# EAGLE board transmitter_new (EAGLE 9.6.2)
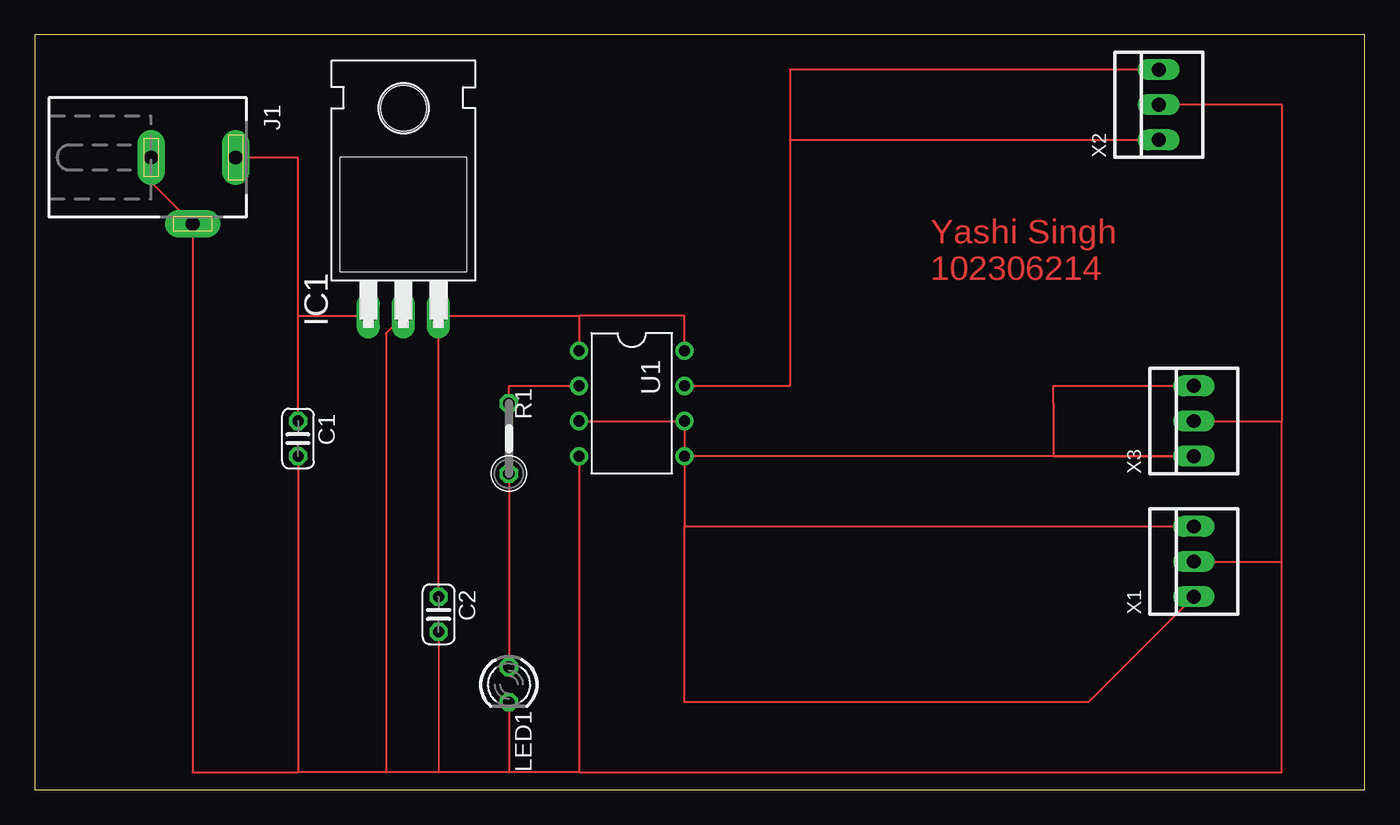
[diagram p0: board, top side]

Size 96.19 x 54.6 mm. Coordinates in mm from the lower left corner, seen from the top.
Outline: 0,0 96.19,0 96.19,54.6 0,54.6 0,0
Copper layers (1*16): Top 0.035mm / dielectric 1.5mm / Bottom 0.035mm
Design rules "default": minimum track width 6mil, minimum drill 0.35mm, track to track 6mil, track to pad 6mil, pad to pad 6mil, via to via 6mil, smd to smd 6mil, copper to edge 40mil, drill to drill 6mil, minimum pad ring 10mil, minimum via ring 8mil, stop-mask expansion 4mil, vias tented up to drill 0mil, thermal gap 10mil

## Footprints (pad centres in the part's own frame; a part is rotated, then mirrored left to right if it is on the bottom)
C025-024X044 = drill 0.813 octagon: 1 -1.27,0; 2 1.27,0
TO220H = drill 1.118 long: 1 -2.54,-10.16; 2 0,-10.16; 3 2.54,-10.16 | hole 3.302: 0,4.826
DCJ0202 = drill 1 pad 2 long: 1 0,3.1; 2 4.8,0; 3 0,-3
LED3MM = drill 0.813 octagon: A -1.27,0; K 1.27,0
0207/5V = drill 0.813 octagon: 1 -2.54,0; 2 2.54,0
PDIP08_300MIL = drill 0.813: 1 -3.81,-3.81; 2 -1.27,-3.81; 3 1.27,-3.81; 4 3.81,-3.81; 5 3.81,3.81; 6 1.27,3.81; 7 -1.27,3.81; 8 -3.81,3.81
22-23-2031 = drill 1 long: 1 -2.54,0; 2 0,0; 3 2.54,0

## Placement (x,y rotation side)
C1  10uF  [C025-024X044]  19.05,25.4 270 top
C2  10PF  [C025-024X044]  29.21,12.7 270 top
IC1  7805T  [TO220H]  26.67,44.45 0 top
J1  DCJ0202  [DCJ0202]  11.43,45.72 270 top
LED1  [LED3MM]  34.29,7.62 270 top
R1  330ohm  [0207/5V]  34.29,25.4 90 top
U1  ATTINY85-20P  [PDIP08_300MIL]  43.18,27.94 270 top
X1  22-23-2031  [22-23-2031]  83.82,16.51 90 top
X2  22-23-2031  [22-23-2031]  81.28,49.53 90 top
X3  22-23-2031  [22-23-2031]  83.82,26.67 90 top

## Library data of the parts
C1 C2 = rcl; SPICEPREFIX: C
IC1 = linear
J1 = con-jack; OC_FARNELL: unknown; OC_NEWARK: unknown
LED1 = led
R1 = rcl; SPICEPREFIX: R
U1 = _hhn_attiny25_45_85
X1-X3 = con-molex; MF: MOLEX; MPN: 22-23-2031; OC_FARNELL: 1462950; OC_NEWARK: 30C0862

## Nets
N$2: C2.1 IC1.3 U1.1 U1.8
N$3: U1.3 X1.1 X1.3
N$4: C1.2 C2.2 IC1.2 J1.2 J1.3 LED1.K U1.4 X1.2 X2.2 X3.2
N$5: R1.2 U1.2
N$6: U1.7 X2.1 X2.3
N$7: U1.5 X3.1 X3.3
N$8: LED1.A R1.1
N$9: C1.1 IC1.1 J1.1

## Tracks (layer width: path | path; a pad name or v marks a point on that pad's centre or on a via)
N$2
  Top 0.152: 39.37,34.29 IC1.3 C2.1 | 39.37,34.29 U1.1 | U1.8 46.99,34.29 39.37,34.29
N$3
  Top 0.152: U1.3 46.99,26.67 46.99,19.05 | 46.99,19.05 X1.3 | X1.1 76.2,6.35 46.99,6.35 46.99,19.05
N$4
  Top 0.152: C1.2 19.05,1.27 | 19.05,1.27 11.43,1.27 J1.2 8.43,43.92 J1.3 | 39.37,1.27 34.29,1.27 | 34.29,1.27 29.21,1.27 | 29.21,1.27 25.4,1.27 | 25.4,1.27 19.05,1.27 | X3.2 90.17,26.67 | X2.2 90.17,49.53 90.17,26.67 | 90.17,16.51 90.17,26.67 | X1.2 90.17,16.51 | C2.2 29.21,1.27 | LED1.K 34.29,1.27 | 39.37,1.27 90.17,1.27 90.17,16.51 | IC1.2 25.4,33.02 25.4,1.27 | U1.4 39.37,1.27
N$5
  Top 0.152: R1.2 34.29,29.21 U1.2
N$6
  Top 0.152: U1.7 54.61,29.21 54.61,46.99 | 54.61,46.99 X2.1 | X2.3 54.61,52.07 54.61,46.99
N$7
  Top 0.152: U1.5 X3.1 73.66,24.13 73.66,27.94 73.66,29.21 X3.3
N$8
  Top 0.152: R1.1 LED1.A
N$9
  Top 0.152: J1.1 19.05,45.72 19.05,34.29 | 19.05,34.29 IC1.1 | C1.1 19.05,34.29

## Text on the board
Top: Yashi Singh / 102306214